# Altium PCB PCB_ESP8266开发板.pcbdoc
Units mil, origin at the board's own origin, x right, y up, seen from the top; angles counter-clockwise.
Board outline 3957.5 x 2445.77 mil, 2 copper layers (Top Layer, Bottom Layer); 36 components, 38 nets, 169 pads, 35 vias.
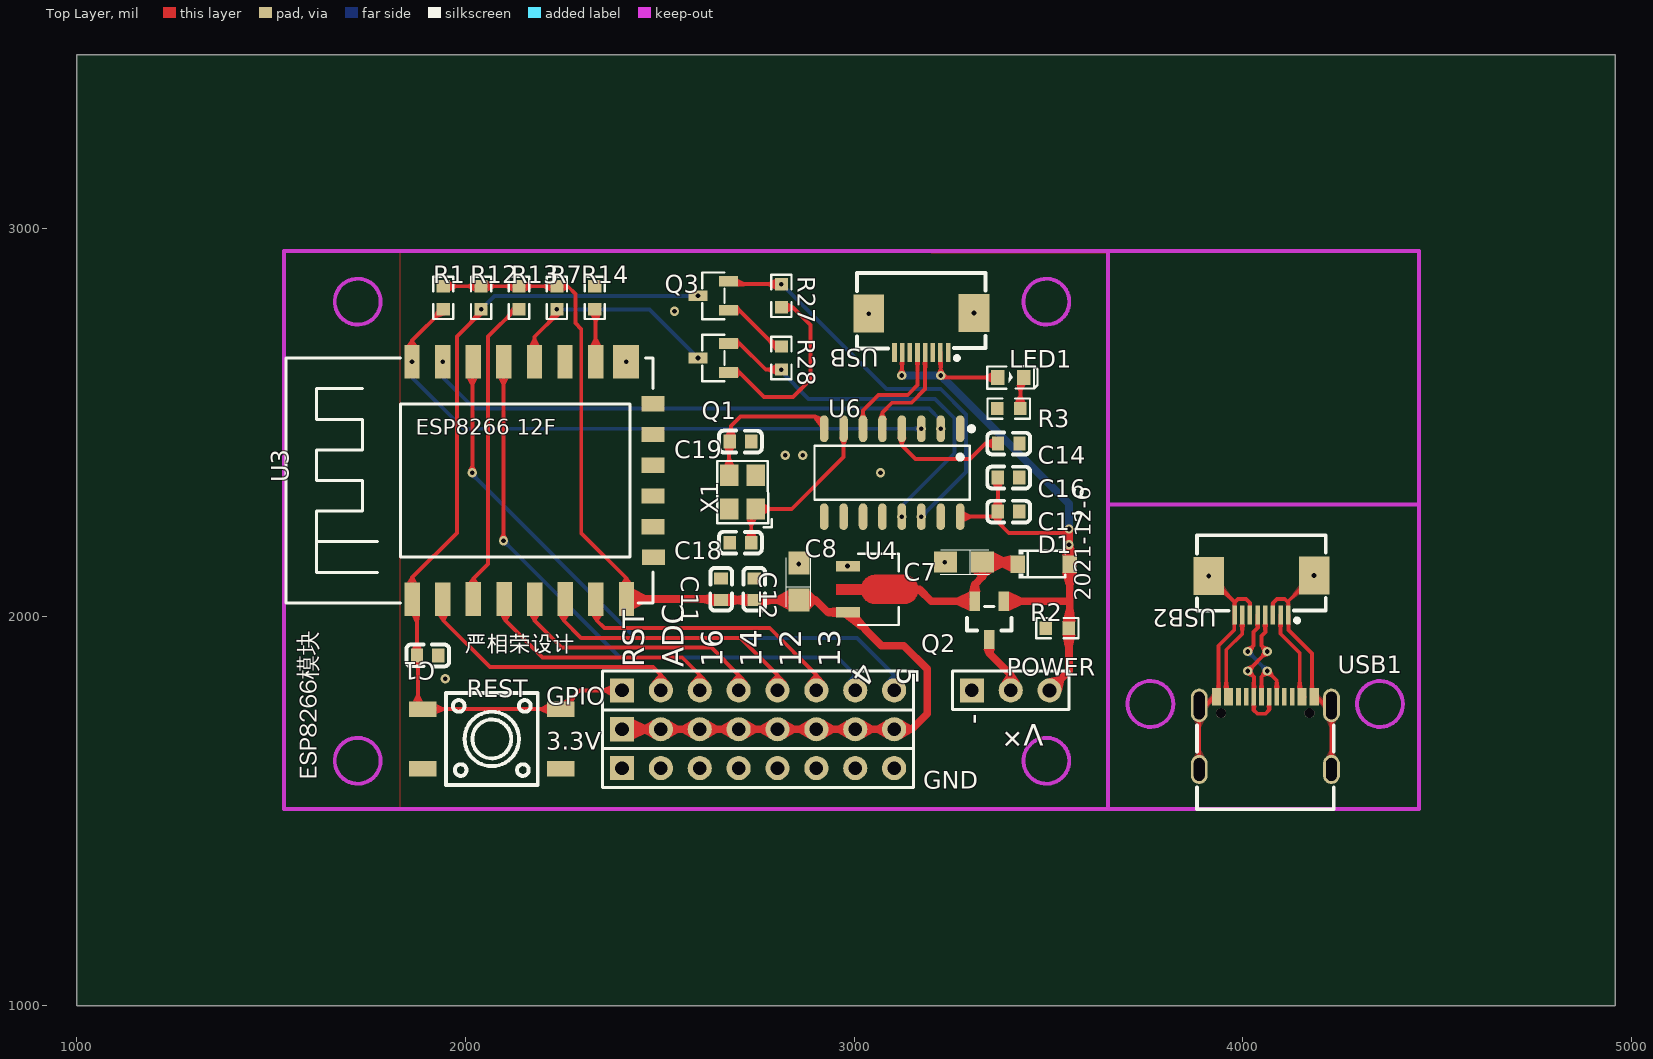
[diagram p0: Top Layer view]
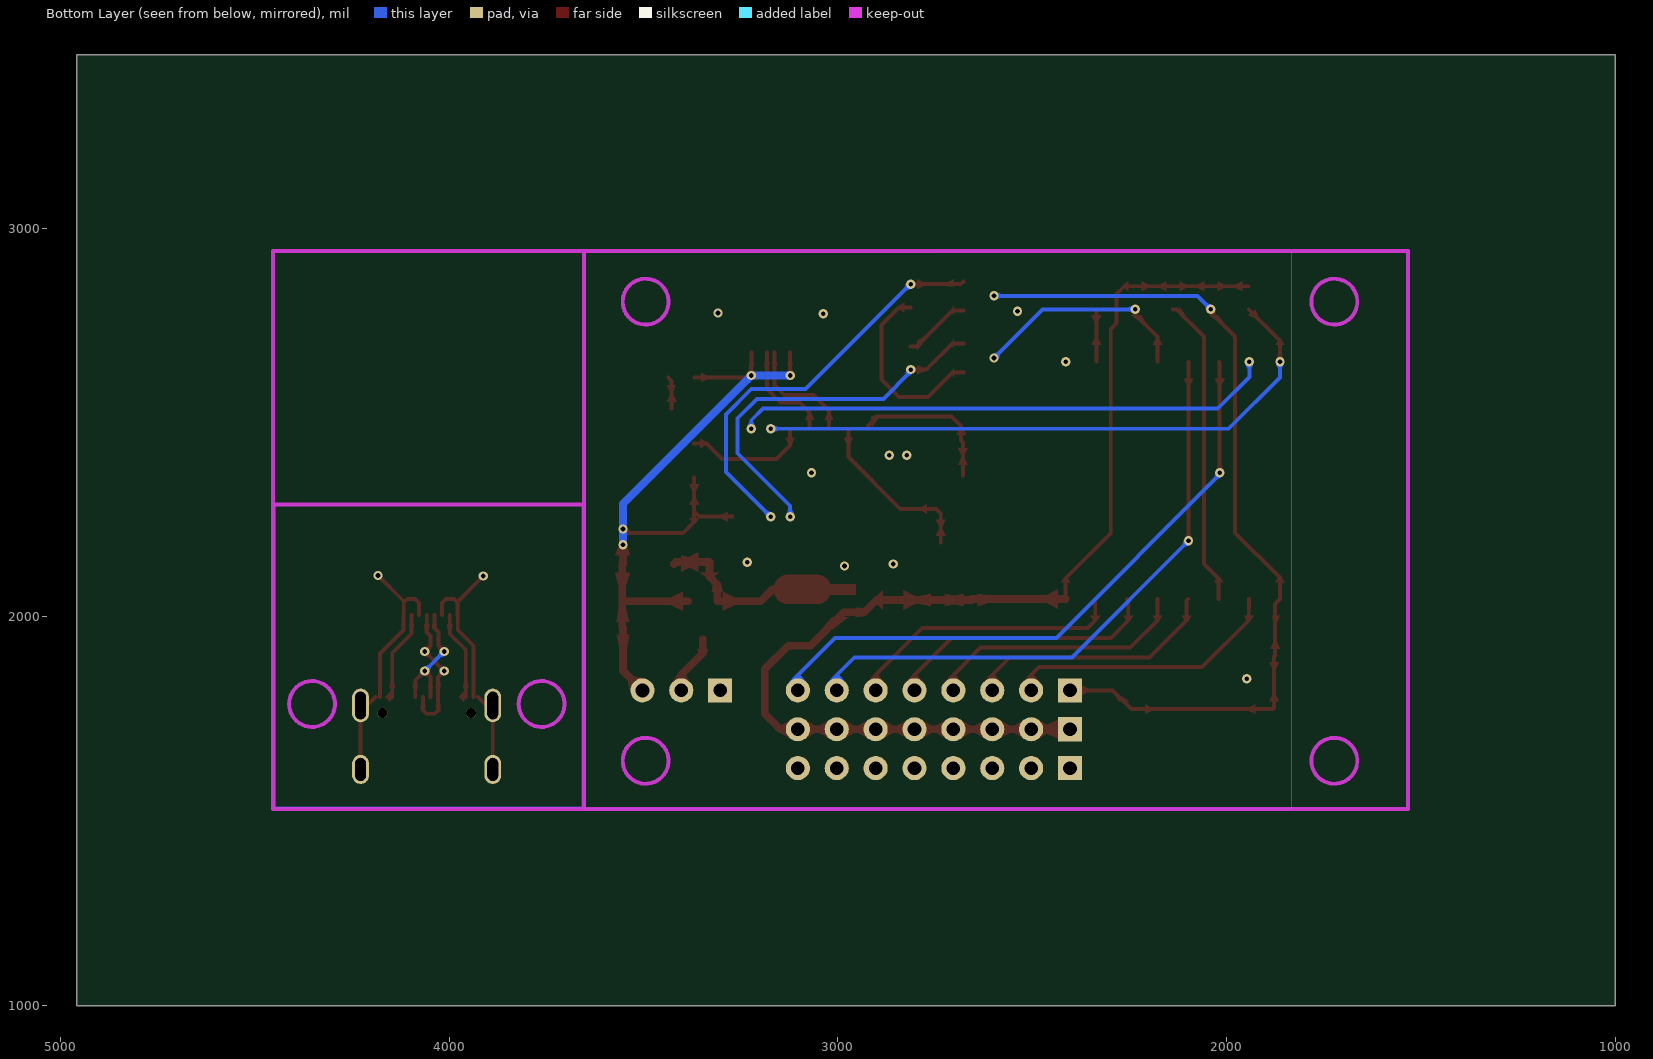
[diagram p1: Bottom Layer view, seen from below]

## Layer stack, top to bottom
Top Layer: signal copper (thickness not stored)
Dielectric: dielectric 12.6, FR-4, Dk 4.8
Bottom Layer: signal copper (thickness not stored)

## Board outline
4957.5,1000 1000,1000 1000,3445.77 4957.5,3445.77

## Components (designator, comment, footprint, x,y, rotation, side; value= is the part's Value field where it differs from the comment)
3.3V "HDR-F-2.54_1x8" HDR-F-2.54_1X8 2702.5,1710.77 r0 top
C1 "0.1u" C0603 1902.5,1900.77 r180 top
C7 "10uF" CASE-A_3216 3282.5,2140.77 r180 top
C8 "10uF" CASE-A_3216 2857.5,2090.77 r90 top
C11 "0.1uF" C0603 2657.5,2070.77 r270 top
C12 "10uF" C0603 2742.5,2070.77 r270 top
C14 "0.01uF" C0603 3397.5,2445.77 r0 top
C16 "0.1uF" C0603 3396.89,2358.38 r180 top
C17 "22uF" C0603 3396.89,2270.77 r180 top
C18 "22pF" C0603 2707.5,2190.77 r0 top
C19 "22pF" C0603 2707.5,2450.77 r0 top
D1 "B5817W" SOD-123_L2.8-W1.8-LS3.7-RD 3487.5,2135.77 r0 top
GND "HDR-F-2.54_1x8" HDR-F-2.54_1X8 2702.5,1610.77 r0 top
GPIO "HDR-F-2.54_1x8" HDR-F-2.54_1X8 2702.5,1810.77 r0 top
LED1 "LED-0603_G" LED0603_GREEN 3402.5,2615.77 r0 top
POWER "HDR-F-2.54_1x3" HDR-F-2.54_1X3 3402.5,1810.77 r0 top
Q1 "S8050" SOT-23-3_L2.9-W1.3-P1.90-LS2.4-BR 2637.5,2665.77 r0 top
Q2 "CJ3401" SOT23-3 3342.5,1995.77 r180 top
Q3 "S8050" SOT-23-3_L2.9-W1.3-P1.90-LS2.4-BR 2637.5,2825.77 r0 top
R1 "10k" R0603 1942.5,2820.77 r270 top
R2 "10k" R0603 3522.5,1970.77 r0 top
R3 "1k" R0603 3397.5,2535.77 r0 top
R7 "10k" R0603 2235,2820.77 r270 top
R12 "10k" R0603 2040,2820.77 r90 top
R13 "10k" R0603 2137.5,2820.77 r90 top
R14 "10k" R0603 2332.5,2820.77 r270 top
R27 "12k" R0603 2812.5,2825.77 r270 top
R28 "12k" R0603 2812.5,2665.77 r90 top
REST "K2-6639SP-D4SC-04" KEY-SMD_4P-L6.0-W6.0-P3.90-LS10.0 2067.51,1685.76 r0 top
U3 "ESP8266 12F" "ESP8266 12F" 2482.5,2035.77 r90 top
U4 "HT7333-A" SOT-89-3_L4.5-W2.5-P1.50-LS4.2-BR 3037.5,2070.77 r180 top
U6 "CH340C" SOP-16_L10.0-W3.9-P1.27-LS6.0-BL 3097.5,2370.77 r180 top
USB "FPC-05F-8PH20" FPC-SMD_8P-P0.50_FPC-05F-8PH20 3172.49,2730.76 r180 top
USB1 "TYPEC-307DSW-ACP16" USB-C-SMD_TYPEC-307DSW-ACP16 4057.5,1700.77 r0 top
USB2 "FPC-05F-8PH20" FPC-SMD_8P-P0.50_FPC-05F-8PH20 4047.49,2055.76 r180 top
X1 "12MHz" OSC-SMD_4P-L3.2-W2.5-BL 2712.5,2320.77 r90 top

## Footprints (in the part's own frame and the unit in brackets; to place one, negate y for a bottom-side part, rotate by r counter-clockwise, add the part's x,y. Pads: shape width x height; smd on the part's side, far side on the other; paste and mask are expansions set on the pad)
C0603 [mm]
  rect 0.8x0.9 smd: 1(-0.7,0) 2(0.7,0)
  silkscreen extent -1.41,-0.71 1.39,0.72
CASE-A_3216 [mil]
  rect 59.05x53.5 smd: 1(-47.24,0) 2(47.25,0)
  silkscreen extent -65,-30 61,33
"ESP8266 12F" [mm]
  rect 2.2x1 smd: 1(0.25,15.748) 2(0.25,13.737) 3(0.252,11.743) 4(0.251,9.735) 5(0.25,7.739) 6(0.251,5.743) 7(0.25,3.739) 8(0.251,1.743) 16(15.758,3.754) 17(15.759,5.754) 18(15.758,7.753) 19(15.759,9.755) 20(15.76,11.755) 21(15.758,13.754) 22(15.758,15.754)
  rect 1x1.5 smd: 9(2.985,-0.013) 10(4.977,0) 11(6.989,0.004) 12(8.989,0.003) 13(11.003,0.006) 14(13.018,0.01)
  rect 2.2x1.7 smd: 15(15.758,1.756)
  silkscreen extent 0,0 16,24
FPC-SMD_8P-P0.50_FPC-05F-8PH20 [mm]
  rect 0.3x1.25 smd: 1(-1.75,1.288) 2(-1.25,1.288) 3(-0.75,1.288) 4(-0.25,1.288) 5(0.25,1.288) 6(0.75,1.288) 7(1.25,1.288) 8(1.75,1.288)
  rect 2x2.5 smd: 9(3.44,-1.252) 10(-3.44,-1.288)
  silkscreen extent -4.2,-3.91 4.2,1.78
HDR-F-2.54_1X3 [mil]
  rect 62x62 hole 35: 1(-100,0)
  round 62 hole 35: 2(0,0)
  round 62 hole 36: 3(100,0)
  silkscreen extent -150,-49 150,50
HDR-F-2.54_1X8 [mil]
  rect 62x62 hole 35: 1(-300,0)
  round 62 hole 35: 2(-200,0) 3(-100,0) 4(0,0) 5(100,0) 6(200,0) 7(300,0) 8(400,0)
  silkscreen extent -350,-50 450,50
KEY-SMD_4P-L6.0-W6.0-P3.90-LS10.0 [mm]
  rect 1.8x1 smd: 1(-4.5,1.95) 2(4.5,1.95) 3(-4.5,-1.95) 4(4.5,-1.95)
  silkscreen extent -3,-3 3,3
LED0603_GREEN [mm]
  rect 0.9x1 smd: 1(-0.85,0) 2(0.85,0)
  silkscreen extent -1.54,-0.73 1.75,0.73
OSC-SMD_4P-L3.2-W2.5-BL [mm]
  rect 1.4x1.2 smd: 1(-1.1,-0.875) 2(1.1,-0.875) 3(1.1,0.875) 4(-1.1,0.875)
  silkscreen extent -2.29,-1.9 2.03,1.65
R0603 [mil]
  rect 31.75x34.02 smd: 1(-29.65,0) 2(29.66,0)
  silkscreen extent -55,-26 55,26
SOD-123_L2.8-W1.8-LS3.7-RD [mm]
  rect 0.95x1.15 smd: 1(-1.693,0) 2(1.693,0)
  silkscreen extent -1.63,-0.94 1.41,0.94
SOP-16_L10.0-W3.9-P1.27-LS6.0-BL [mm]
  oval 0.56x1.745 smd: 1(-4.445,-2.873) 2(-3.175,-2.873) 3(-1.905,-2.873) 4(-0.635,-2.873) 5(0.635,-2.873) 6(1.905,-2.873) 7(3.175,-2.873) 8(4.445,-2.873) 9(4.445,2.873) 10(3.175,2.873) 11(1.905,2.873) 12(0.635,2.873) 13(-0.635,2.873) 14(-1.905,2.873) 15(-3.175,2.873) 16(-4.445,2.873)
  silkscreen extent -5.33,-3.02 5.08,1.77
SOT23-3 [mm]
  rect 0.7x1.25 smd: 1(-1.067,-1.123) 2(0.833,-1.123) 3(-0.117,1.377)
  silkscreen extent -1.58,-0.77 1.34,0.78
SOT-23-3_L2.9-W1.3-P1.90-LS2.4-BR [mm]
  rect 1.25x0.7 smd: 1(1,-0.95) 2(1,0.95) 3(-1,0)
  silkscreen extent -0.73,-1.53 0.73,1.53
SOT-89-3_L4.5-W2.5-P1.50-LS4.2-BR [mm]
  rect 1.575x0.672 smd: 1(1.356,-1.5) 3(1.356,1.5)
  round 0 smd: 2(-1.356,0.009)
  Top Layer region: -2.283,0.959 -0.429,0.959 -0.384,0.958 -0.34,0.955 -0.296,0.949 -0.252,0.942 -0.208,0.933 -0.165,0.921 -0.123,0.908 -0.081,0.893 -0.04,0.875 0,0.856 0.04,0.835 0.078,0.812 0.115,0.788 0.151,0.761 0.185,0.733 0.219,0.704 0.251,0.673 0.281,0.64 0.31,0.606 0.337,0.571 0.362,0.534 0.386,0.497 0.408,0.458 0.428,0.418 0.447,0.339 2.144,0.339 2.144,-0.321 0.447,-0.321 0.428,-0.401 0.408,-0.44 0.386,-0.479 0.362,-0.517 0.337,-0.553 0.31,-0.588 0.281,-0.622 0.251,-0.655 0.219,-0.686 0.185,-0.716 0.151,-0.744 0.115,-0.77 0.078,-0.795 0.04,-0.818 0,-0.839 -0.04,-0.858 -0.081,-0.875 -0.123,-0.89 -0.165,-0.904 -0.208,-0.915 -0.252,-0.925 -0.296,-0.932 -0.34,-0.937 -0.384,-0.94 -0.429,-0.941 -2.283,-0.941 -2.328,-0.94 -2.372,-0.937 -2.416,-0.932 -2.46,-0.925 -2.504,-0.915 -2.547,-0.904 -2.589,-0.89 -2.631,-0.875 -2.672,-0.858 -2.713,-0.839 -2.752,-0.818 -2.79,-0.795 -2.827,-0.77 -2.863,-0.744 -2.898,-0.716 -2.931,-0.686 -2.963,-0.655 -2.993,-0.622 -3.022,-0.588 -3.049,-0.553 -3.075,-0.517 -3.098,-0.479 -3.12,-0.44 -3.141,-0.401 -3.159,-0.36 -3.175,-0.318 -3.189,-0.276 -3.202,-0.233 -3.212,-0.19 -3.22,-0.146 -3.227,-0.102 -3.231,-0.058 -3.233,-0.013 -3.233,0.031 -3.231,0.076 -3.227,0.12 -3.22,0.164 -3.212,0.208 -3.202,0.251 -3.189,0.294 -3.175,0.336 -3.159,0.377 -3.141,0.418 -3.12,0.458 -3.098,0.497 -3.075,0.534 -3.049,0.571 -3.022,0.606 -2.993,0.64 -2.963,0.673 -2.931,0.704 -2.898,0.733 -2.863,0.761 -2.827,0.788 -2.79,0.812 -2.752,0.835 -2.713,0.856 -2.672,0.875 -2.631,0.893 -2.589,0.908 -2.547,0.921 -2.504,0.933 -2.46,0.942 -2.416,0.949 -2.372,0.955 -2.328,0.958
  silkscreen extent -1.95,-2.33 0.7,2.33
USB-C-SMD_TYPEC-307DSW-ACP16 [mm]
  oval 1.1x2.2 hole 0.7 slot 1.8 at 90 deg: 17(-4.32,1.808) 20(4.32,1.808)
  oval 1.1x1.9 hole 0.7 slot 1.5 at 90 deg: 18(-4.32,-2.373) 19(4.32,-2.373)
  rect 0.3x1.15 smd: A1(-3.35,2.373) A4(-2.55,2.373) A5(-1.25,2.373) A6(-0.25,2.373) A7(0.25,2.373) A8(1.25,2.373) A9(2.55,2.372) A12(3.35,2.373) B1(3.05,2.373) B4(2.25,2.372) B5(1.75,2.373) B6(0.75,2.373) B7(-0.75,2.373) B8(-1.75,2.373) B9(-2.25,2.373) B12(-3.05,2.373)
  round 0.65 hole 0.65 unplated: ""(-2.89,1.308) ""(2.89,1.308)
  silkscreen extent -4.47,-4.97 4.47,0.49

## Via types
v1: diameter 24, hole 12, Top Layer to Bottom Layer, tented both sides, 35 vias

## Nets (pads, with @x,y where several pads share a name; then routed paths per layer and width w, separated by ;. In a path a pad name is that pad's centre, name@x,y a point inside that pad or via, vN(x,y) a via of type N, cw(c..) or ccw(c..) an arc to the next point about the centre after c; other vN are vias at no path point)
ADC: GPIO.2 U3.2 | length 712.9
  Top Layer w10: U3.2@1941.7,2045.67 1942.5,1990.77 2062.5,1870.77 2482.5,1870.77 2502.5,1850.77 GPIO.2
BAT+: POWER.2 Q2.3 | length 153.7
  Top Layer w20: Q2.3 3347.1,1906.17 3402.5,1850.77 POWER.2
C14_1: C14.1 U6.4 | length 321.6
  Top Layer w10: U6.4 3122.5,2440.77 3157.5,2405.77 3297.5,2405.77 3337.5,2445.77 C14.1
C18_2: C18.2 U6.7 X1.1 | length 445.5
  Top Layer w10: C18.2 2735.1,2265.57 X1.1 2839.2,2277.47 2972.5,2410.77 U6.7
C19_1: C19.1 U6.8 X1.3 | length 396.1
  Top Layer w10: X1.3@2678.1,2364.07 2678.1,2448.87 C19.1 2682.5,2453.37 2682.5,2490.77 2707.5,2515.77 2897.5,2515.77 2922.5,2490.77 U6.8
D+: U6.5 USB.4 | length 270.9
  Top Layer w10: U6.5 3072.5,2525.77 3097.5,2550.77 3147.5,2550.77 3182.3,2585.67 USB.4
D-: U6.6 USB.5 | length 298.2
  Top Layer w10: U6.6 3022.5,2530.77 3062.5,2570.77 3137.5,2570.77 3162.7,2595.97 USB.5@3162.7,2680.07
GND: C1.1 C7.2 C8.2 C11.1 C12.1 C14.2 C16.1 C17.1 C18.1 C19.2 GND.1 GND.2 GND.3 GND.4 GND.5 GND.6 GND.7 GND.8 POWER.1 R2.1 R3.1 R14.1 REST.3 REST.4 U3.15 U4.1 U6.1 USB.1 USB.3 USB.6 USB.8 USB.9 USB.10 X1.2 X1.4
  other v1: 1947.5,1840.77 2982.5,2130.77 2857.5,2135.77 3232.5,2140.77 3067.5,2370.77 2822.5,2415.77 2867.5,2415.77 2413.38,2656.17 3037.07,2780.08 3307.94,2781.46 2537.5,2785.77
GPIO0: Q1.3 R7.2 U3.18 | length 573.8
  Top Layer w10: U3.18 2177.3,2720.57 2235,2778.27 v1(2235,2791.07)
  Bottom Layer w10: v1(2235,2791.07) 2472.8,2791.07 v1(2598.13,2665.77)
GPIO4: GPIO.7 U3.19 | length 1548.7
  Top Layer w10: v1(2097.5,2195.77) 2097.5,2655.27 U3.19
  Bottom Layer w10: v1(2097.5,2195.77) 2397.5,1895.77 2957.5,1895.77 3002.5,1850.77 GPIO.7
GPIO5: GPIO.8 U3.20 | length 1629.7
  Top Layer w10: v1(2017.5,2370.77) 2017.5,2653.97 U3.20@2019.7,2656.27
  Bottom Layer w10: v1(2017.5,2370.77) 2017.5,2365.77 2437.5,1945.77 3007.5,1945.77 3102.5,1850.77 GPIO.8
GPIO12: GPIO.5 U3.6 | length 704.5
  Top Layer w10: U3.6@2256.4,2045.67 2252.5,2041.77 2252.5,1990.77 2297.5,1945.77 2707.5,1945.77 2802.5,1850.77 GPIO.5
GPIO13: GPIO.6 U3.7 | length 718.7
  Top Layer w10: U3.7 2337.5,2043.37 2337.5,1990.77 2357.5,1970.77 2782.5,1970.77 2902.5,1850.77 GPIO.6
GPIO14: GPIO.4 U3.5 | length 677.9
  Top Layer w10: U3.5@2177.8,2045.67 2177.5,1990.77 2247.5,1920.77 2632.5,1920.77 2702.5,1850.77 GPIO.4
GPIO16: GPIO.3 U3.4 | length 654.3
  Top Layer w10: U3.4@2099.2,2045.67 2102.5,2042.37 2102.5,1990.77 2197.5,1895.77 2557.5,1895.77 2602.5,1850.77 GPIO.3
LED1_2: LED1.2 R3.2 | length 83.6
  Top Layer w10: R3.2 3427.2,2606.97 LED1.2
Q1_1: Q1.1 R27.2 | length 488.8
  Top Layer w10: Q1.1 2704.9,2628.37 2767.5,2565.77 2842.5,2565.77 2887.5,2610.77 2887.5,2750.77 2842.5,2795.77 R27.2
Q1_2: Q1.2 R28.1 U6.13 | length 967.1
  Top Layer w10: Q1.2 2705.1,2703.17 2772.2,2636.07 v1(2812.5,2636.07)
  Bottom Layer w10: v1@2812.5,2630.77 2882.5,2560.77 3207.5,2560.77 3257.5,2510.77 3257.5,2420.77 3122.5,2285.77 v1(3122.5,2257.68)
Q3_1: Q3.1 R28.2 | length 174.1
  Top Layer w10: Q3.1 2704.9,2788.37 2797.8,2695.47 R28.2@2812.5,2695.47
Q3_2: Q3.2 R27.1 U6.14 | length 1063.2
  Top Layer w10: Q3.2 2684.3,2855.77 v1(2812.5,2855.77)
  Bottom Layer w10: v1(2812.5,2855.77) 3082.5,2585.77 3222.5,2585.77 3287.5,2520.77 3287.5,2372.67 v1(3172.5,2257.68)
R13_1: R13.1 U3.3 | length 799.7
  Top Layer w10: U3.3 2020.2,2098.47 2057.5,2135.77 2057.5,2720.77 2127.8,2791.07 R13.1
R14_2: R14.2 U3.16 | length 135.8
  Top Layer w10: R14.2 2334.7,2788.87 U3.16@2334.7,2656.17
RST: C1.2 GPIO.1 Q3.3 R12.1 REST.1 REST.2 U3.1 | length 2223.8
  Top Layer w10: v1(2040,2791.07) 2040,2783.27 1977.5,2720.77 1977.5,2215.77 1862.5,2100.77 U3.1 1874.9,2033.17 C1.2 1877.5,1898.17 1877.5,1765.77 1880.7,1762.57 1890.3,1762.57 2244.7,1762.57 2292.9,1810.77 GPIO.1
  Bottom Layer w10: v1(2040,2791.07) 2074.7,2825.77 v1(2598.13,2825.77)
RXD: U3.21 U6.2 | length 1388.5
  Bottom Layer w10: v1(1941,2656.17) 1941,2617.27 2022.5,2535.77 3192.5,2535.77 3222.5,2505.77 v1(3222.5,2483.86)
S$2608: 
S$2612: 
S$2650: 
S$6042: 
S$7408: 
TXD: R1.2 U3.22 U6.3 | length 1573.2
  Top Layer w10: v1(1862.3,2656.17) 1862.3,2710.87 R1.2
  Bottom Layer w10: v1(1862.3,2656.17) 1862.3,2615.97 1994.4,2483.87 v1(3172.5,2483.86)
USB1_20: USB1.17 USB1.18 USB1.19 USB1.20 USB1.A1 USB1.A12 USB1.B1 USB1.B12 USB2.1 USB2.3 USB2.6 USB2.8 USB2.9 USB2.10 | length 1300
  Top Layer w10: USB1.18 3887.4,1771.97 3903.4,1771.97 USB1.A1 ; v1(3912.07,2105.08) 3978.6,2038.57 3978.6,2036.87 ; USB1.B12 3937.4,1925.67 3977.5,1965.77 3977.5,2003.97 USB2.8 3978.6,2036.87 ; USB2.6 4018,2035.27 4007.5,2045.77 3987.5,2045.77 3978.6,2036.87 ; USB2.3 4077,2035.27 4087.5,2045.77 4107.5,2045.77 4116.4,2036.87 ; USB1.B1 4177.6,1905.77 4117.5,1965.77 4117.5,2003.97 USB2.1 4116.4,2036.87 ; v1(4182.94,2106.46) 4116.4,2039.97 4116.4,2036.87 ; USB1.A12 4211.6,1771.97 4227.6,1771.97 USB1.19
USB1_A4: USB1.A4 USB1.B9 USB2.7 | length 239.8
  Top Layer w10: USB1.B9 USB1.A4 3957.1,1915.37 3998.3,1956.57 USB2.7
USB1_A6: USB1.A6 USB1.B6 USB2.5 | length 324.9
  Top Layer w10: v1(4012.5,1910.77) 4027.5,1925.77 4027.5,1960.77 4037.6,1970.87 USB2.5 ; USB1.A6 4047.7,1845.97 v1(4062.5,1860.77) 4087,1836.27 USB1.B6
  Bottom Layer w10: v1(4012.5,1910.77) v1(4062.5,1860.77)
USB1_A7: USB1.A7 USB1.B7 USB2.4 | length 368.4
  Top Layer w10: USB2.4 4057.5,1960.77 4047.5,1950.77 4047.5,1925.77 v1(4062.5,1910.77) ; USB1.A7 4067.3,1760.57 4057.5,1750.77 4037.5,1750.77 4027.5,1760.77 USB1.B7 4028,1845.27 v1(4012.5,1860.77) v1(4062.5,1910.77) ; v1@4067.3,1911.37 4066.7,1910.77 v1(4062.5,1910.77)
USB1_A9: USB1.A9 USB1.B4 USB2.2 | length 243.2
  Top Layer w10: USB2.2 4096.7,1956.57 4146.1,1907.17 USB1.B4 USB1.A9
V3.3: 3.3V.1 3.3V.2 3.3V.3 3.3V.4 3.3V.5 3.3V.6 3.3V.7 3.3V.8 C8.1 C11.2 C12.2 R1.1 R7.1 R12.2 R13.2 U3.8 U4.3 | length 2952.7
  Top Layer w10: R1.1@1942.5,2850.47 2235,2850.47 2262.8,2850.47 2282.5,2830.77 2282.5,2755.77 2297.5,2740.77 2297.5,2215.77 2413.9,2099.37 U3.8@2413.9,2045.67
  Top Layer w20: 3.3V.1 3.3V.8 3147.5,1710.77 3187.5,1750.77 3187.5,1865.77 3127.5,1925.77 3070,1925.77 U4.3 2931.6,2011.67 2899.7,2043.57 2857.5,2043.57 2800.5,2043.57 2800.1,2043.17 C12.2 C11.2 2655.1,2045.67 U3.8@2413.9,2045.67
VBUS: C16.2 C17.2 D1.2 LED1.1 POWER.3 Q2.1 R2.2 U6.16 USB.2 USB.7 | length 1987.9
  Top Layer w10: v1(3122.5,2620.77) USB.7 ; USB.2 v1(3222.5,2620.77) 3227.5,2615.77 LED1.1 ; U6.16 3356.2,2257.67 C17.2 ; C16.2 C17.2 ; v1(3552.5,2185.77) 3552.5,2215.77 3397.5,2215.77 3369.3,2243.97 C17.2
  Top Layer w20: Q2.1 3554.1,2039.97 ; POWER.3 3552.2,1860.47 R2.2 3554.1,1972.77 D1.2 3552.5,2135.77 v1(3552.5,2185.77) v1(3552.5,2225.77)
  Bottom Layer w20: v1(3122.5,2620.77) v1(3222.5,2620.77) 3552.5,2290.77 v1(3552.5,2225.77) v1(3552.5,2185.77)
VCC: C7.1 D1.1 Q2.2 U4.2 | length 433.7
  Top Layer w20: 3090.9,2070.47 3167.9,2070.37 3198.3,2039.97 Q2.2 3309.7,2082.97 3329.7,2102.97 C7.1 3415.9,2140.77 D1.1
pads on no net: U3.9 U3.10 U3.11 U3.12 U3.13 U3.14 U3.17 U6.9 U6.10 U6.11 U6.12 U6.15 USB1. USB1.A5 USB1.A8 USB1.B5 USB1.B8

## Polygon pours and split planes (outlines as drawn)
GND on Bottom Layer (solid): 1832.5,1505.77 1832.5,2940.77 3652.5,2935.77 3652.5,1505.77 1832.5,1505.77
USB1_20 on Bottom Layer (solid): 3657.5,2285.77 4447.5,2285.77 4447.5,1510.77 3657.5,1510.77
GND on Top Layer (solid): 1832.5,1505.77 1832.5,2940.77 3652.5,2935.77 3652.5,1505.77 1832.5,1505.77
USB1_20 on Top Layer (solid): 3657.5,2285.77 4447.5,2285.77 4447.5,1510.77 3657.5,1510.77

## Keep-outs
Keep-Out Layer:
  circle w10 net S$2650: c3494.15,1629.67 r59.06
  circle w10 net S$2650: c1722.5,1629.67 r59.06
  circle w10 net S$2650: c3494.15,2810.77 r59.06
  circle w10 net S$2650: c1722.5,2810.77 r59.06
  circle w10 net S$2650: c3761.95,1775.77 r59.06
  circle w10 net S$2650: c4352.5,1775.77 r59.06

## Other copper
Top Layer:
  region net VBUS: 3283.52,2270.17 3283.52,2245.17 3298.52,2252.67 3298.52,2262.67
  region net C19_1: 2911.48,2489.29 2913.97,2514.17 2901.04,2519.3 2897.5,2508.7
  region net C18_2: 2983.52,2460.53 2961.48,2460.53 2967.5,2445.53 2977.5,2445.53
  region net D-: 3033.52,2507.18 3011.48,2507.18 3017.5,2522.18 3027.5,2522.18
  region net D+: 3083.52,2507.18 3061.48,2507.18 3067.5,2522.18 3077.5,2522.18
  region net C14_1: 3133.52,2460.53 3111.48,2460.53 3117.5,2445.53 3127.5,2445.53
  region net VCC: 3163.07,2081.64 3163.07,2059.2 3167.85,2060.42 3167.85,2080.42
  region net USB1_A9: 4102.6,1980.46 4090.79,1980.46 4091.7,1965.46 4101.7,1965.46
  region net USB1_A7: 4063.23,1980.46 4051.42,1980.46 4052.48,1965.46 4062.48,1965.46
  region net USB1_A6: 4043.55,1980.46 4031.74,1980.46 4032.6,1970.87 4042.6,1970.87
  region net USB1_A4: 4004.18,1980.46 3992.37,1980.46 3993.3,1965.46 4003.3,1965.46
  region net VBUS: 3227.6,2655.46 3215.79,2655.46 3217.23,2640.46 3227.23,2640.46
  region net D+: 3188.23,2655.46 3176.42,2655.46 3177.3,2640.46 3187.3,2640.46
  region net D-: 3168.55,2655.46 3156.74,2655.46 3157.7,2640.46 3167.7,2640.46
  region net VBUS: 3129.18,2655.46 3117.37,2655.46 3117.77,2640.46 3127.77,2640.46
  region net RST: 2209.24,1750.07 2209.24,1775.07 2194.24,1767.57 2194.24,1757.57
  region net RST: 2251.86,1782.22 2276.86,1782.22 2286.43,1797.22 2272.29,1797.22
  region net RST: 1865,1782.22 1890,1782.22 1882.5,1797.22 1872.5,1797.22
  region net RST: 1925.77,1775.07 1925.77,1750.07 1940.77,1757.57 1940.77,1767.57
  region net RST: 2371.5,1798.27 2371.5,1823.27 2356.5,1815.77 2356.5,1805.77
  region net V3.3: 2433.5,1735.77 2433.5,1685.77 2463.5,1700.77 2463.5,1720.77
  region net C19_1: 2665.6,2391.63 2690.6,2391.63 2683.1,2406.63 2673.1,2406.63
  region net C18_2: 2770.57,2289.97 2770.57,2264.97 2785.57,2272.47 2785.57,2282.47
  region net C18_2: 2747.6,2249.9 2723.33,2249.9 2730.1,2234.9 2740.1,2234.9
  region net USB1_A9: 4152,1781.67 4152,1806.67 4146.1,1799.17 4146.1,1789.17
  region net USB1_A9: 4151.99,1806.67 4151.99,1781.67 4157.9,1789.17 4157.9,1799.17
  region net USB1_A9: 4140.18,1816.81 4151.99,1816.81 4151.1,1831.81 4141.1,1831.81
  region net USB1_A6: 4081.12,1816.81 4092.93,1816.81 4092,1831.81 4082,1831.81
  region net USB1_A7: 4073.25,1771.54 4061.44,1771.54 4062.3,1760.57 4072.3,1760.57
  region net USB1_A6: 4041.75,1816.81 4053.56,1816.81 4052.7,1831.81 4042.7,1831.81
  region net USB1_A7: 4022.07,1816.81 4033.88,1816.81 4033,1831.81 4023,1831.81
  region net USB1_A7: 4033.88,1771.54 4022.07,1771.54 4022.5,1760.84 4032.5,1760.77
  region net USB1_A4: 3963.01,1781.67 3963.01,1806.67 3957.1,1799.17 3957.1,1789.17
  region net USB1_A4: 3963.02,1806.67 3963.02,1781.67 3968.9,1789.17 3968.9,1799.17
  region net USB1_A4: 3951.21,1816.81 3963.02,1816.81 3962.1,1831.81 3952.1,1831.81
  region net V3.3: 2953.1,2024.94 2953.1,1998.48 2931.55,2001.71 2931.55,2021.71
  region net V3.3: 2972.33,1998.48 3015.11,1998.48 3041.47,1968.48 3013.19,1968.48
  region net R14_2: 2322.2,2699.45 2347.2,2699.45 2339.7,2714.45 2329.7,2714.45
  region net GPIO0: 2164.8,2699.46 2189.8,2699.46 2182.3,2714.46 2172.3,2714.46
  region net GPIO4: 2110,2612.88 2085,2612.88 2092.5,2597.88 2102.5,2597.88
  region net GPIO5: 2030,2612.92 2005,2612.92 2012.5,2597.92 2022.5,2597.92
  region net TXD: 1849.8,2699.45 1874.8,2699.45 1867.3,2710.87 1857.3,2710.87
  region net V3.3: 2401.4,2088.95 2426.4,2088.95 2418.9,2099.37 2408.9,2099.37
  region net V3.3: 2433.57,2070.67 2433.57,2020.67 2463.57,2035.67 2463.57,2055.67
  region net GPIO13: 2350,2002.3 2325,2002.3 2332.5,1990.77 2342.5,1990.77
  region net GPIO12: 2265,2002.34 2240,2002.34 2247.5,1990.77 2257.5,1990.77
  region net GPIO14: 2190.06,2002.31 2165.06,2002.31 2172.5,1990.8 2182.5,1990.77
  region net GPIO16: 2115,2002.34 2090,2002.34 2097.5,1990.77 2107.5,1990.77
  region net R13_1: 2007.7,2088.99 2032.7,2088.99 2025.2,2098.47 2015.2,2098.47
  region net ADC: 1954.83,2002.32 1929.83,2002.32 1937.5,1990.77 1947.5,1990.84
  region net RST: 1850,2088.91 1875,2088.91 1867.5,2100.77 1857.5,2100.77
  region net RST: 1882.19,2002.3 1862.4,2002.3 1869.9,1987.3 1879.9,1987.3
  region net Q1_2: 2795.49,2648.57 2795.49,2623.57 2780.49,2631.07 2780.49,2641.07
  region net Q3_1: 2795.49,2685.27 2795.49,2710.27 2780.49,2719.84 2780.49,2705.7
  region net Q3_2: 2795.49,2868.27 2795.49,2843.27 2780.49,2850.77 2780.49,2860.77
  region net Q1_1: 2829.51,2808.4 2829.51,2783.4 2842.45,2790.77 2842.5,2800.77
  region net R14_2: 2347.2,2775.24 2322.2,2775.24 2329.7,2760.24 2339.7,2760.24
  region net R13_1: 2120.49,2796.26 2120.49,2775.24 2105.49,2761.69 2105.49,2775.83
  region net V3.3: 2154.51,2862.97 2154.51,2837.97 2169.51,2845.47 2169.51,2855.47
  region net V3.3: 2120.49,2837.97 2120.49,2862.97 2105.49,2855.47 2105.49,2845.47
  region net RST: 2022.99,2775.24 2044.47,2775.24 2024.04,2760.24 2009.9,2760.24
  region net V3.3: 2057.01,2862.97 2057.01,2837.97 2072.01,2845.47 2072.01,2855.47
  region net V3.3: 2022.99,2837.97 2022.99,2862.97 2007.99,2855.47 2007.99,2845.47
  region net V3.3: 2217.99,2862.97 2217.99,2837.97 2202.99,2845.47 2202.99,2855.47
  region net V3.3: 2252.01,2837.97 2252.01,2862.97 2262.8,2855.47 2262.8,2845.47
  region net GPIO0: 2244.47,2775.24 2219.47,2775.24 2209.9,2760.24 2224.04,2760.24
  region net VBUS: 3536.28,1987.77 3568.03,1987.77 3564.13,2017.77 3544.13,2017.77
  region net VBUS: 3568.03,1953.76 3536.28,1953.76 3542.16,1923.76 3562.16,1923.76
  region net V3.3: 1959.51,2837.97 1959.51,2862.97 1974.51,2855.47 1974.51,2845.47
  region net TXD: 1945.83,2775.24 1925.49,2789.77 1919.78,2775.42 1928.03,2769.53
  region net VBUS: 3398.29,2064.57 3398.29,2015.36 3428.29,2029.97 3428.29,2049.97
  region net VCC: 3295.93,2064.57 3323.49,2064.57 3319.71,2082.98 3299.71,2082.98
  region net VCC: 3295.93,2015.36 3295.93,2064.57 3265.93,2049.97 3265.93,2029.97
  region net BAT+: 3360.89,1916.96 3333.33,1916.96 3337.11,1906.16 3357.11,1906.16
  region net Q3_2: 2701.47,2868.27 2701.47,2849.39 2716.47,2850.77 2716.47,2860.77
  region net Q3_1: 2701.47,2800.87 2701.47,2775.87 2704.9,2783.37 2704.9,2793.37
  region net Q1_2: 2701.47,2715.67 2701.47,2690.67 2705.1,2698.17 2705.1,2708.17
  region net Q1_1: 2701.47,2640.87 2701.47,2615.87 2704.9,2623.37 2704.9,2633.37
  region net VCC: 3402.17,2115.77 3402.17,2158.41 3372.17,2150.77 3372.17,2130.77
  region net VBUS: 3535.43,2158.41 3572.83,2158.41 3562.5,2185.77 3542.5,2185.77
  region net VBUS: 3572.83,2113.13 3535.43,2113.13 3544.13,2083.13 3564.13,2083.13
  region net V3.3: 2884.25,2068.53 2884.25,2018.53 2899.74,2033.53 2899.74,2053.53
  region net V3.3: 2830.75,2018.53 2830.75,2068.53 2800.75,2053.53 2800.75,2033.53
  region net VCC: 3359.27,2165.77 3359.27,2115.77 3389.27,2130.77 3389.27,2150.77
  region net VCC: 3354.74,2114.02 3304.74,2114.02 3319.74,2103.01 3339.74,2103.01
  region net C19_1: 2670,2468.49 2695,2468.49 2687.5,2483.49 2677.5,2483.49
  region net C19_1: 2690.6,2433.05 2665.6,2433.05 2673.1,2418.05 2683.1,2418.05
  region net C18_2: 2722.6,2208.49 2747.6,2208.49 2740.1,2223.49 2730.1,2223.49
  region net VBUS: 3356.8,2288.49 3381.8,2288.49 3374.3,2303.49 3364.3,2303.49
  region net VBUS: 3381.8,2253.05 3356.8,2253.05 3364.3,2243.97 3374.3,2243.97
  region net VBUS: 3381.8,2340.66 3356.8,2340.66 3364.3,2325.66 3374.3,2325.66
  region net C14_1: 3354.19,2433.27 3354.19,2458.27 3339.19,2450.77 3339.19,2440.77
  region net V3.3: 2760.21,2058.96 2760.21,2027.46 2790.21,2033.17 2790.21,2053.17
  region net V3.3: 2724.79,2027.46 2724.79,2058.96 2694.79,2053.17 2694.79,2033.17
  region net V3.3: 2675.21,2058.96 2675.21,2027.46 2705.21,2033.17 2705.21,2053.17
  region net V3.3: 2639.79,2027.46 2639.79,2058.96 2609.79,2055.67 2609.79,2035.67
  region net RST: 1862.4,1918.49 1887.4,1918.49 1879.9,1933.49 1869.9,1933.49
  region net RST: 1890,1883.05 1865,1883.05 1872.5,1868.05 1882.5,1868.05
  region net LED1_2: 3414.7,2552.77 3439.7,2552.77 3432.2,2567.77 3422.2,2567.77
  region net VBUS: 3351.32,2603.27 3351.32,2628.27 3336.32,2620.77 3336.32,2610.77
  region net LED1_2: 3439.7,2596.08 3418.25,2596.08 3422.2,2581.08 3432.2,2581.08
  region net USB1_A6: 4024.48,1910.02 4011.75,1922.74 4020.52,1925.86 4027.59,1918.78
  region net USB1_A7: 4063.25,1898.79 4050.52,1911.52 4047.41,1902.75 4054.48,1895.68
  region net USB1_A7: 4063.25,1922.74 4050.52,1910.02 4047.41,1918.78 4054.48,1925.86
  region net USB1_A6: 4063.25,1848.79 4050.52,1861.52 4047.41,1852.75 4054.48,1845.68
  region net USB1_A6: 4074.48,1861.52 4061.75,1848.79 4070.52,1845.68 4077.59,1852.75
  region net USB1_A7: 4024.48,1860.02 4011.75,1872.74 4020.52,1875.86 4027.59,1868.78
  region net USB1_A7: 4024.48,1861.52 4011.75,1848.79 4020.52,1845.68 4027.59,1852.75
  region net Q3_2: 2804.56,2846.77 2804.56,2864.77 2796.16,2860.77 2796.16,2850.77
  region net Q1_2: 2804.56,2627.07 2804.56,2645.07 2796.16,2641.07 2796.16,2631.07
  region net VBUS: 3543.5,2217.83 3561.5,2217.83 3562.5,2209.43 3542.5,2209.43
  region net VBUS: 3551.73,2213.79 3540.71,2228.03 3535.71,2220.77 3543.45,2210.77
  region net VBUS: 3543.5,2217.83 3561.5,2217.83 3557.5,2209.43 3547.5,2209.43
  region net VBUS: 3543.5,2193.71 3561.5,2193.71 3562.5,2202.11 3542.5,2202.11
  region net VBUS: 3543.5,2177.83 3561.5,2177.83 3562.5,2169.43 3542.5,2169.43
  region net VBUS: 3543.5,2193.71 3561.5,2193.71 3557.5,2202.11 3547.5,2202.11
  region net VBUS: 3231.39,2628.83 3213.39,2628.58 3217.28,2637.04 3227.28,2637.17
  region net VBUS: 3232.81,2626.91 3227.3,2609.77 3236.45,2610.77 3239.66,2620.77
  region net VBUS: 3131.61,2628.58 3113.61,2628.83 3117.72,2637.17 3127.72,2637.04
  region net GPIO0: 2226,2783.13 2244,2783.13 2240,2778.27 2230,2778.27
  region net RST: 2028.47,2787.73 2044.75,2780.05 2037.83,2774.03 2028.22,2778.56
  region net GPIO4: 2088.5,2203.71 2106.5,2203.71 2102.5,2212.11 2092.5,2212.11
  region net GPIO5: 2008.5,2378.71 2026.5,2378.71 2022.5,2387.11 2012.5,2387.11
  region net TXD: 1853.3,2664.11 1871.3,2664.11 1867.3,2672.51 1857.3,2672.51
  region net GPIO13: 2925.75,1831.27 2879.25,1831.27 2897.5,1850.77 2907.5,1850.77
  region net GPIO12: 2825.75,1831.27 2779.25,1831.27 2797.5,1850.77 2807.5,1850.77
  region net GPIO14: 2725.75,1831.27 2679.25,1831.27 2697.5,1850.77 2707.5,1850.77
  region net GPIO16: 2625.75,1831.27 2579.25,1831.27 2597.5,1850.77 2607.5,1850.77
  region net ADC: 2525.75,1831.27 2479.25,1831.27 2497.5,1850.77 2507.5,1850.77
  region net V3.3: 3082,1687.52 3082,1734.02 3060.3,1720.77 3060.3,1700.77
  region net V3.3: 3123,1687.52 3123,1734.02 3144.7,1720.77 3144.7,1700.77
  region net V3.3: 2982,1687.52 2982,1734.02 2960.3,1720.77 2960.3,1700.77
  region net V3.3: 3023,1687.52 3023,1734.02 3044.7,1720.77 3044.7,1700.77
  region net V3.3: 2882,1687.52 2882,1734.02 2860.3,1720.77 2860.3,1700.77
  region net V3.3: 2923,1687.52 2923,1734.02 2944.7,1720.77 2944.7,1700.77
  region net V3.3: 2782,1687.52 2782,1734.02 2760.3,1720.77 2760.3,1700.77
  region net V3.3: 2823,1687.52 2823,1734.02 2844.7,1720.77 2844.7,1700.77
  region net V3.3: 2682,1687.52 2682,1734.02 2660.3,1720.77 2660.3,1700.77
  region net V3.3: 2723,1687.52 2723,1734.02 2744.7,1720.77 2744.7,1700.77
  region net V3.3: 2582,1687.52 2582,1734.02 2560.3,1720.77 2560.3,1700.77
  region net V3.3: 2623,1687.52 2623,1734.02 2644.7,1720.77 2644.7,1700.77
  region net V3.3: 2482,1687.52 2482,1734.02 2460.3,1720.77 2460.3,1700.77
  region net V3.3: 2523,1687.52 2523,1734.02 2544.7,1720.77 2544.7,1700.77
  region net VBUS: 3500.56,1841.71 3533.44,1808.83 3539.41,1833.54 3525.27,1847.68
  region net BAT+: 3425.75,1831.27 3379.25,1831.27 3392.5,1850.77 3412.5,1850.77
Bottom Layer:
  region net USB1_A6: 4024.48,1911.52 4011.75,1898.79 4020.52,1895.68 4027.59,1902.75
  region net USB1_A6: 4063.25,1872.74 4050.52,1860.02 4047.41,1868.78 4054.48,1875.86
  region net Q3_2: 2824.48,2856.52 2811.75,2843.79 2820.52,2840.68 2827.59,2847.75
  region net Q1_2: 2809.02,2624.58 2824.33,2634.05 2825.46,2624.88 2816.73,2619.47
  region net VBUS: 3543.5,2233.71 3561.5,2233.71 3562.5,2242.11 3542.5,2242.11
  region net VBUS: 3543.5,2217.83 3561.5,2217.83 3562.5,2209.43 3542.5,2209.43
  region net VBUS: 3543.5,2193.71 3561.5,2193.71 3562.5,2202.11 3542.5,2202.11
  region net VBUS: 3214.56,2611.77 3214.56,2629.77 3206.16,2630.77 3206.16,2610.77
  region net VBUS: 3234.48,2621.52 3221.75,2608.79 3226.98,2602.14 3241.12,2616.29
  region net VBUS: 3130.44,2611.77 3130.44,2629.77 3138.84,2630.77 3138.84,2610.77
  region net Q3_2: 3184.48,2256.92 3171.75,2269.65 3180.52,2272.76 3187.59,2265.69
  region net Q1_2: 3113.5,2265.61 3131.5,2265.61 3127.5,2274.01 3117.5,2274.01
  region net GPIO0: 2598.87,2677.75 2586.15,2665 2583.03,2673.77 2590.09,2680.85
  region net GPIO0: 2242.94,2782.07 2242.94,2800.07 2251.34,2796.07 2251.34,2786.07
  region net RST: 2590.19,2816.77 2590.19,2834.77 2581.79,2830.77 2581.79,2820.77
  region net RST: 2051.98,2790.32 2039.25,2803.04 2048.02,2806.16 2055.09,2799.08
  region net GPIO4: 2109.48,2196.52 2096.75,2183.79 2105.52,2180.68 2112.59,2187.75
  region net GPIO5: 2014.17,2359.24 2029.36,2368.91 2030.6,2359.74 2021.96,2354.24
  region net RXD: 1932,2648.23 1950,2648.23 1946,2639.83 1936,2639.83
  region net TXD: 1853.3,2648.23 1871.3,2648.23 1867.3,2639.83 1857.3,2639.83
  region net RXD: 3213.5,2491.8 3231.5,2491.8 3227.5,2500.2 3217.5,2500.2
  region net TXD: 3164.57,2492.86 3164.56,2474.86 3156.16,2478.87 3156.17,2488.87
  region net GPIO5: 3125.75,1831.27 3079.25,1831.27 3097.5,1850.77 3107.5,1850.77
  region net GPIO4: 3025.75,1831.27 2979.25,1831.27 2997.5,1850.77 3007.5,1850.77

## Silkscreen, mask and mechanical layers (free items; w line width, h text height)
Top Overlay:
  text "2021-12-6" at 3622.5,2040.77 h70.87 r90
  text "严相荣设计" at 1997.5,1895.77 h70.87
  text "4" at 3015.1,1886.97 h55.12 r234
  text "RST" at 2460.06,1870.77 h55.12 r90
  text "ADC" at 2560.88,1870.77 h55.12 r90
  text "16" at 2661.69,1870.77 h55.12 r90
  text "14" at 2762.51,1870.77 h55.12 r90
  text "12" at 2863.33,1870.77 h55.12 r90
  text "13" at 2964.14,1870.77 h55.12 r90
  text "5" at 3110.65,1870.77 h55.12 r270
  text "-" at 3289.94,1750.77 h55.12 r270
  text "+" at 3413.01,1725.26 h55.12 r225
  text "V" at 3487.5,1723.33 h55.12 r180
  text "ESP8266模块" at 1632.5,1580.77 h78.74 r90